# Altium PCB KitchenTimerPCBsmd.PcbDoc
Units mm, origin at the board's own origin, x right, y up, seen from the top; angles counter-clockwise.
Board outline 100 x 100 mm, 2 copper layers (Top Layer, Bottom Layer); 42 components, 39 nets, 169 pads, 24 vias.
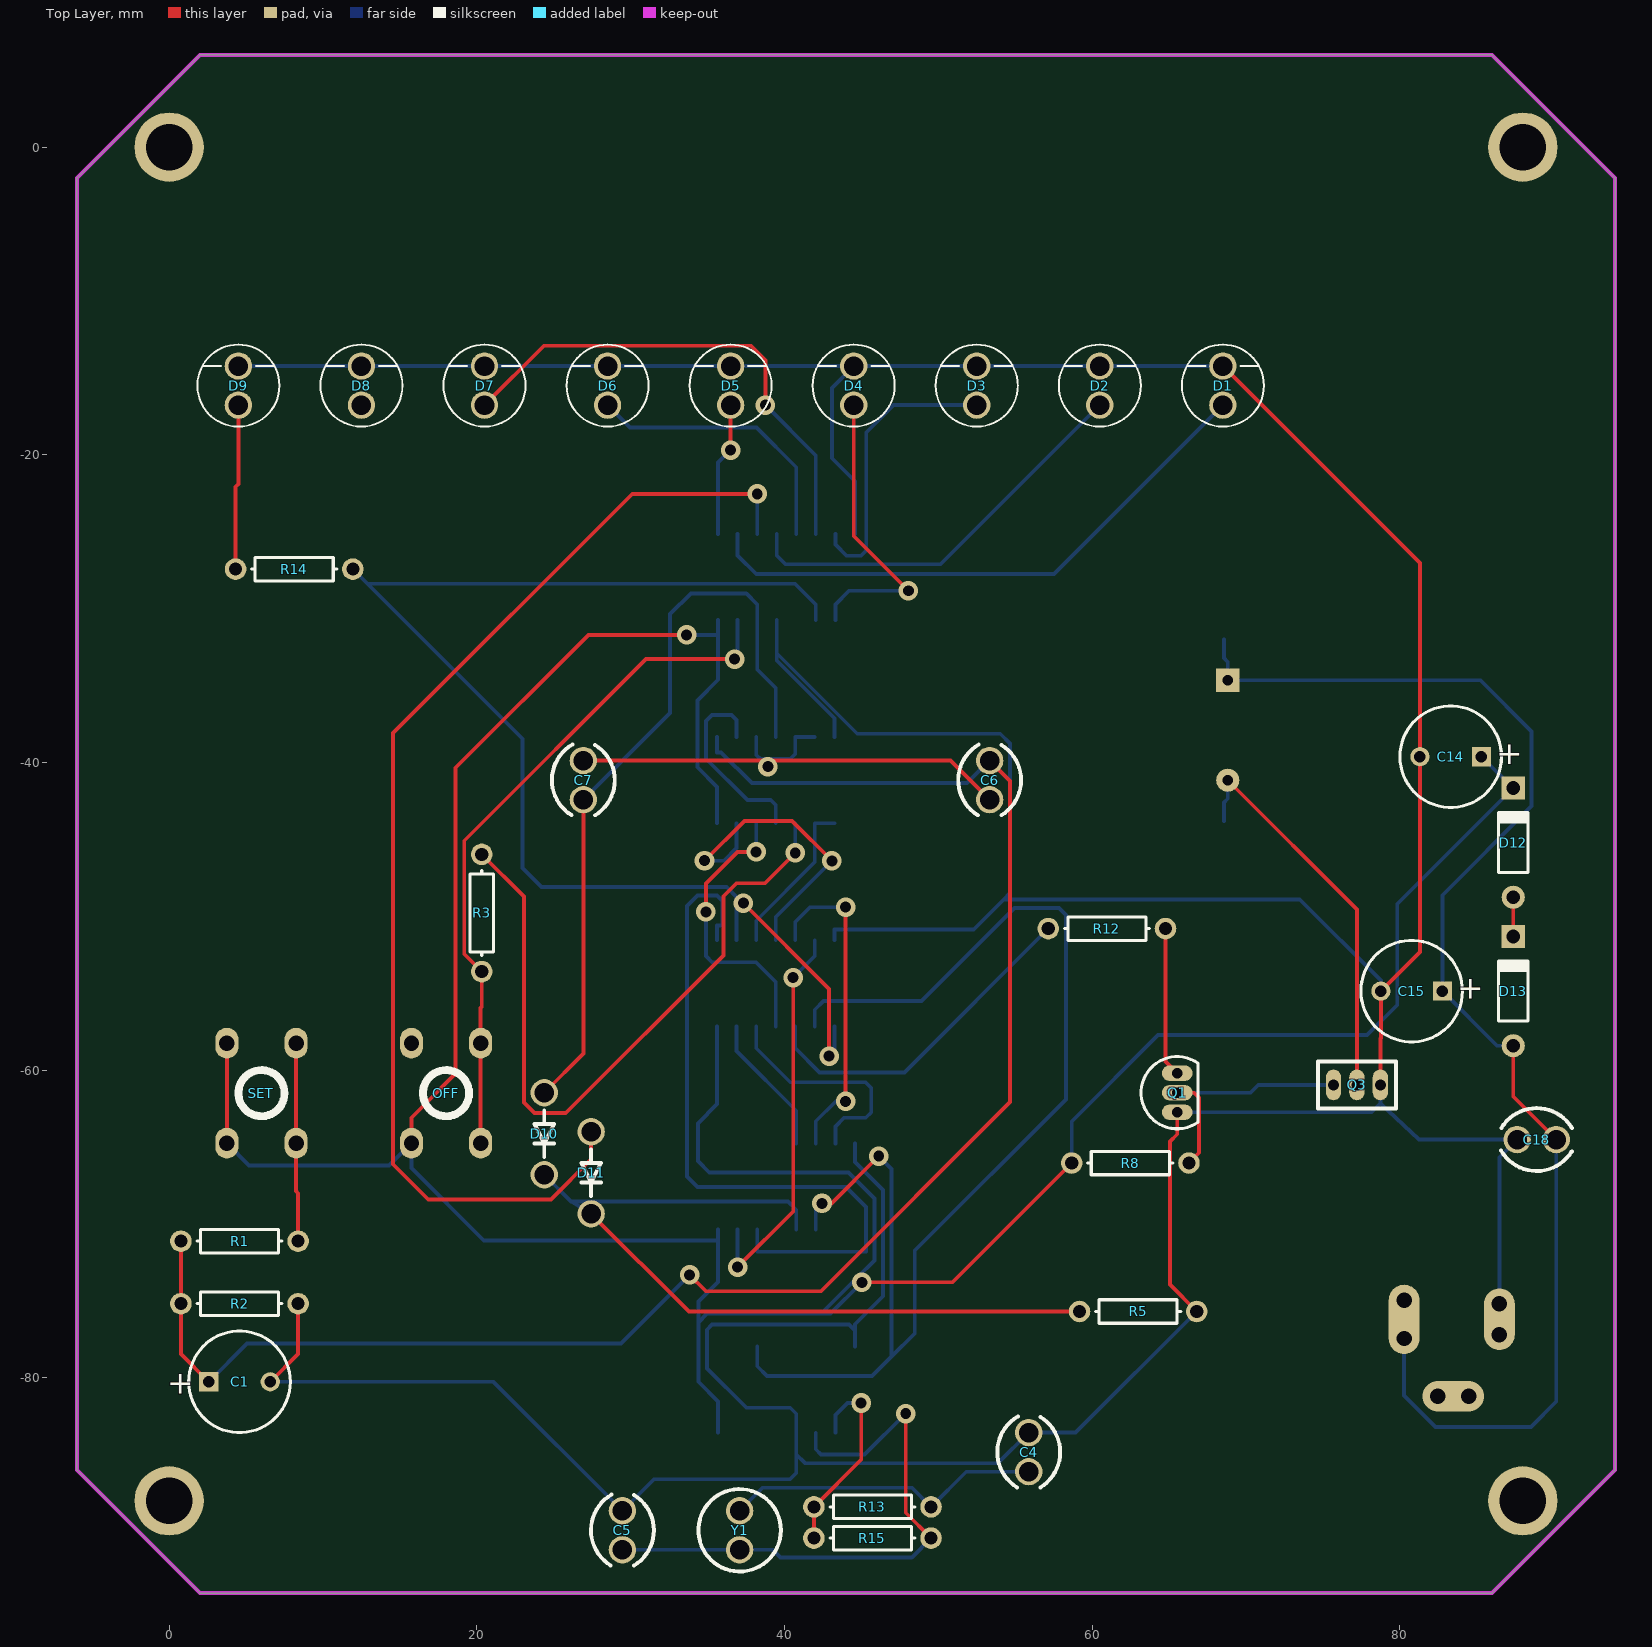
[diagram p0: Top Layer view]
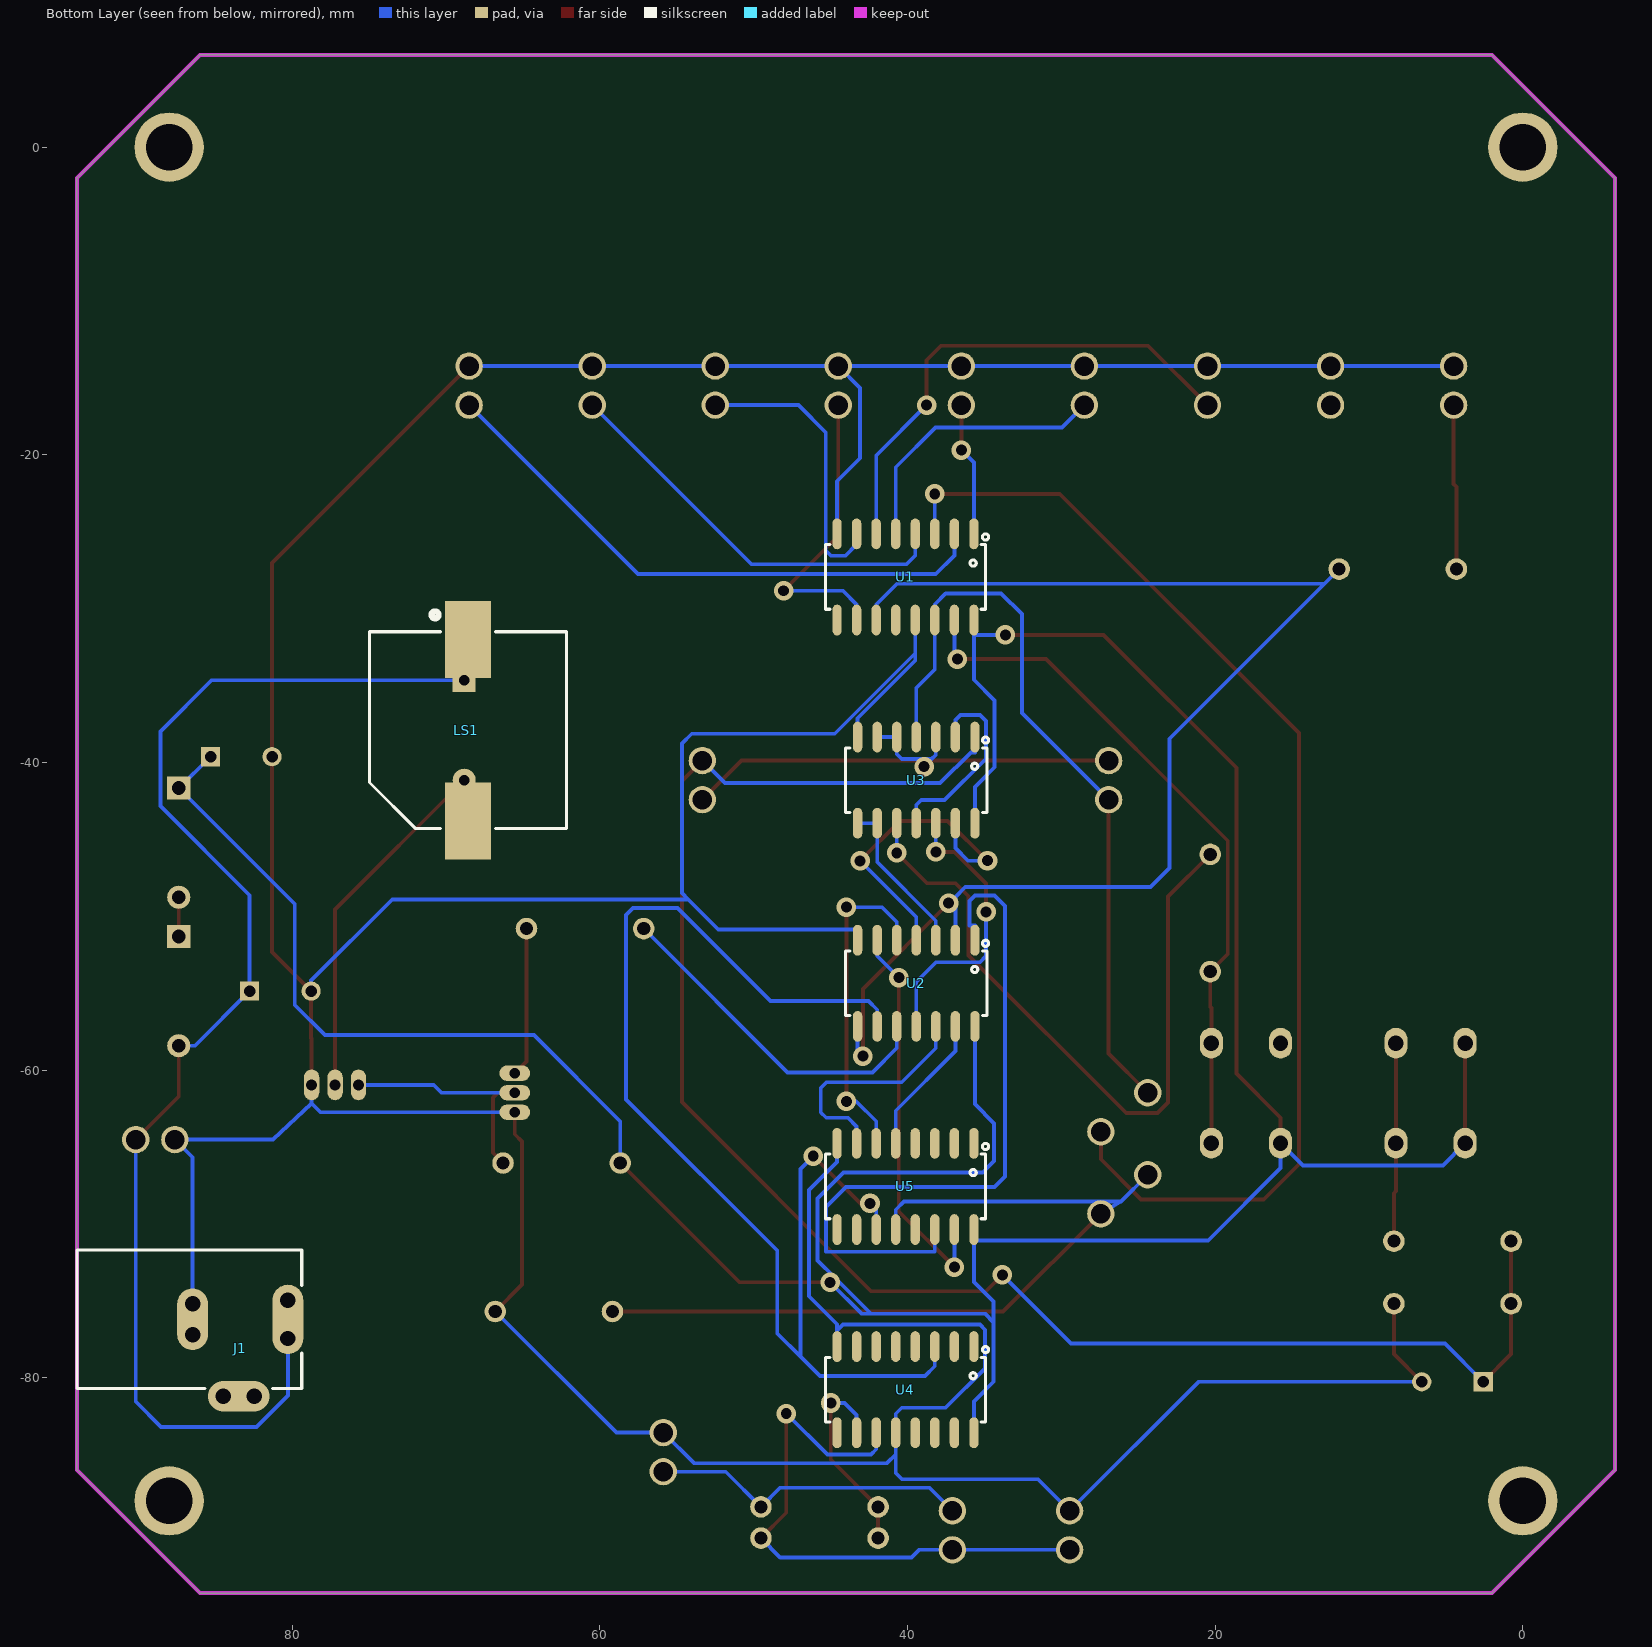
[diagram p1: Bottom Layer view, seen from below]
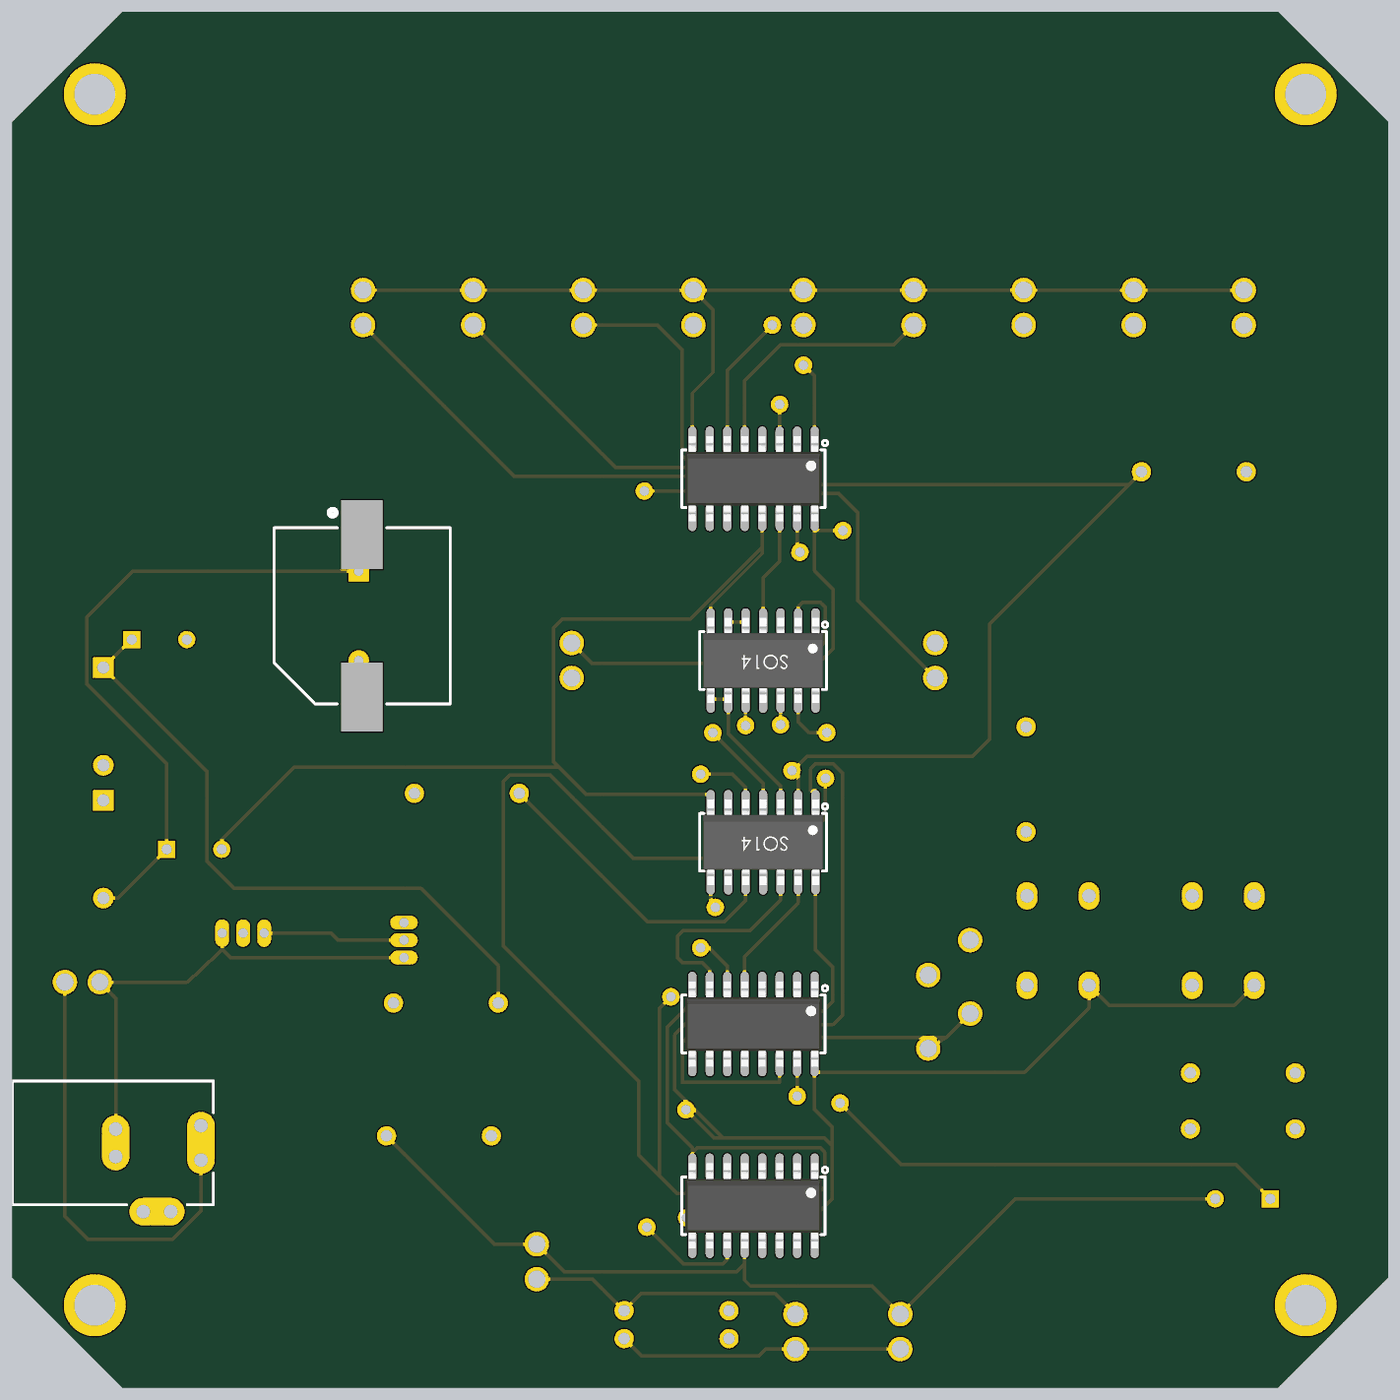
[diagram p2: 3D render of the assembled board from below, using the file's embedded part models]

## Layer stack, top to bottom
Top Layer: signal copper 0.0356
Dielectric: dielectric 0.32, FR-4, Dk 4.8
Bottom Layer: signal copper 0.0356

## Board outline
-6,-86 -6,-2 2,6 86,6 94,-2 94,-86 86,-94 2,-94

## Design rules (kind name [scope] priority, off if disabled: settings)
Clearance [All] p1: gap=0.3
DiffPairsRouting [All] p1 off: maxlimit=0.254 minlimit=0.254 mostfreqgap=0.254 maxuncoupledlength=12.7
FanoutControl Fanout_BGA [IsBGA] p1 off: bgadir=Out bgaviamode=Centered fanoutstyle=Auto fanoutdirection=Alternating viagrid=0.025 // Fanout_BGA (Default Rule)
FanoutControl Fanout_LCC [IsLCC] p2 off: bgadir=Out bgaviamode=Centered fanoutstyle=Auto fanoutdirection=Alternating viagrid=0.025 // Fanout_LCC (Default Rule)
FanoutControl Fanout_SOIC [IsSOIC] p3 off: bgadir=Out bgaviamode=Centered fanoutstyle=Auto fanoutdirection=Alternating viagrid=0.025 // Fanout_SOIC (Default Rule)
FanoutControl Fanout_Small [(CompPinCount < 5)] p4 off: bgadir=Out bgaviamode=Centered fanoutstyle=Auto fanoutdirection=OutThenIn viagrid=0.025 // Fanout_Small (Default Rule)
FanoutControl Fanout_Default [All] p5 off: bgadir=Out bgaviamode=Centered fanoutstyle=Auto fanoutdirection=Alternating viagrid=0.025 // Fanout_Default (Default Rule)
MinimumSolderMaskSliver [All] p1: minsoldermaskwidth=0.001
PolygonConnect [All] p1: connectstyle=Relief reliefconductorwidth=0.254 reliefentries=4 polygonreliefangle="90 Angle"
RoutingPriority [All] p1 off: routingpriority=0
RoutingTopology [All] p1 off: topology=Shortest
RoutingVias [All] p1 off: holewidth=0.711 width=1.27 viastyle="Through Hole" minholewidth=0.711 minwidth=1.27 maxholewidth=0.711 maxwidth=1.27
SilkToSilkClearance [All] p1: silktosilkclearance=0.001
SilkscreenOverComponentPads [All] p1: minsilkscreentomaskgap=0.001
SolderMaskExpansion [All] p1 off: expansion=0.102
TestPointUsage [All] p1: valid=0 allowmultiple=FALSE
Testpoint [All] p1: side=15 testpointundercomponent=TRUE minsize=1.016 maxsize=2.54 preferedsize=1.524 minholesize=0 maxholesize=1.016 preferedholesize=0.813 testpointgrid=0.025 style=1023 order=0-112345678
Width [All] p1: maxlimit=0.25 minlimit=0.25 preferedwidth=0.25
13 further rules are at their usual default settings.

## Components (designator, comment, footprint, x,y, rotation, side; value= is the part's Value field where it differs from the comment)
C1 "Cap Pol1" A 4.572,-80.264 r0 top
C4 "Cap" CAP100N 55.88,-84.836 r90 top
C5 "Cap" CAP100N 29.464,-89.916 r90 top
C6 "Cap" CAP100N 53.34,-41.148 r90 top
C7 "Cap" CAP100N 26.924,-41.148 r90 top
C14 "Cap Pol1" A 83.312,-39.624 r180 top
C15 "Cap Pol1" A 80.772,-54.864 r180 top
C18 "Cap" CAP100N 88.9,-64.516 r180 top
D1 "GRN" LED3MM 68.5,-15.5 r90 top locked (schematic designator D9)
D2 "GRN" LED3MM 60.5,-15.5 r90 top locked (schematic designator D5)
D3 "GRN" LED3MM 52.5,-15.5 r90 top locked (schematic designator D10)
D4 "GRN" LED3MM 44.5,-15.5 r90 top locked (schematic designator D6)
D5 "GRN" LED3MM 36.5,-15.5 r90 top locked (schematic designator D11)
D6 "GRN" LED3MM 28.5,-15.5 r90 top locked (schematic designator D7)
D7 "GRN" LED3MM 20.5,-15.5 r90 top locked (schematic designator D12)
D8 "GRN" LED3MM 12.5,-15.5 r90 top locked
D9 "RED" LED3MM 4.5,-15.5 r90 top locked (schematic designator D13)
D10 "1N4148" D_LN 24.384,-61.468 r270 top (schematic designator D14)
D11 "1N4148" D_LN 27.432,-64.008 r270 top (schematic designator D3)
D12 "1N4001" DO-35 87.376,-45.212 r90 top (schematic designator D22)
D13 "1N4001" DO-35 87.376,-54.864 r90 top (schematic designator D23)
J1 "PWR2.5" KLD-0202 93.98,-76.2 r180 bottom
LS1 "Buzzer" ABSM-1574 68.58,-32.004 r270 bottom
OFF "SW-PB" BUTTN 18,-61.5 r90 top locked
Q1 "C945" TO-92 65.532,-61.468 r0 top
Q3 "BD139" BD139 77.216,-60.96 r270 top
R1 "Res1" AXIAL-0.3 4.572,-71.12 r180 top
R2 "Res1" AXIAL-0.3 4.572,-75.184 r0 top
R3 "Res1" AXIAL-0.3 20.32,-49.784 r270 top
R5 "Res1" AXIAL-0.3 62.992,-75.692 r0 top
R8 "Res1" AXIAL-0.3 62.484,-66.04 r180 top
R12 "Res1" AXIAL-0.3 60.96,-50.8 r0 top
R13 "Res1" AXIAL-0.3 45.72,-88.392 r180 top
R14 "Res1" AXIAL-0.3 8.128,-27.432 r0 top
R15 "Res1" AXIAL-0.3 45.72,-90.424 r180 top
SET "SW-PB" BUTTN 6,-61.5 r270 top locked
U1 "HEF4017BT" SO_16 40.132,-27.94 r270 bottom
U2 "HEF4011BT" SO_14 39.432,-54.356 r270 bottom
U3 "HEF4001BT" SO_14 39.432,-41.148 r270 bottom
U4 "HEF4060BT" SO_16 40.132,-80.772 r270 bottom
U5 "HEF4060BT" SO_16 40.132,-67.564 r270 bottom
Y1 "ECS-040-20-4X-DU" XTAL 37.084,-89.916 r90 top

## Footprints (in the part's own frame and the unit in brackets; to place one, negate y for a bottom-side part, rotate by r counter-clockwise, add the part's x,y. Pads: shape width x height; smd on the part's side, far side on the other; paste and mask are expansions set on the pad)
A [mm] "Capacitor, Electrolytic, Radial; Body 4 x 5 mm (Dia.xH typ); Pin Spacing 1.5 mm (typ)"
  rect 1.25x1.25 hole 0.75: 1(-2,0)
  round 1.25 hole 0.75: 2(2,0)
  silkscreen extent -3.3,-3.3 3.3,3.3
ABSM-1574 [mm] "Magnetic Transducer Buzzer"
  rect 5x3 smd: 1(0,0) 2(11.8,0)
  rect 1.5x1.5 hole 0.7: 1A(2.65,-0.24)
  round 1.5 hole 0.7: 2A(9.15,-0.24)
  silkscreen extent -1.83,-6.4 12.3,6.4
AXIAL-0.3 [mm] "Resistor; 2 Leads"
  round 1.4 hole 0.85: 1(-3.81,0) 2(3.81,0)
  silkscreen extent -2.77,-0.76 2.77,0.76
BD139 [mm]
  oval 2x1 hole 0.7: 1(0,0) 2(0,-1.524) 3(0,1.524)
  silkscreen extent -1.52,-2.54 1.52,2.54
BUTTN [mm]
  oval 2x1.5 hole 1: 1(-3.25,2.25) 1(3.25,2.25) 2(-3.25,-2.25) 2(3.25,-2.25)
  silkscreen extent -1.5,-1.5 1.5,1.5
CAP100N [mil]
  round 70 hole 50: 1(50,0) 2(-50,0)
  silkscreen extent -90,-80 91,80
D_LN [mil]
  round 70 hole 50: 1(0,0) 2(210,0)
  silkscreen extent 45,-25 165,25
DO-35 [mm] "Diode, Axial; Body 3.8 x 1.9 mm (LxDia. max), Lead Dia. 0.53 mm (max)"
  round 1.5 hole 0.9: 1(-3.55,0)
  rect 1.5x1.5 hole 0.9: 2(3.55,0)
  silkscreen extent -1.95,-0.95 2.05,0.95
KLD-0202 [mm] "DC Power Jack, 2.5mm, KLD Series, PCB Mount"
  oval 2x4.5 all layers, no hole: 1(13.7,0)
  round 1.5 hole 1: 1A(13.7,-1.25) 1B(13.7,1.25) 2A(7.5,-1) 2B(7.5,1) 3A(9.5,-5) 3B(11.5,-5)
  oval 2x4 all layers, no hole: 2(7.5,0)
  oval 4x2 all layers, no hole: 3(10.5,-5)
  silkscreen extent 0,-4.5 14.6,4.5
LED3MM [mil] "Typical INFRARED GaAs LED; 2 Leads"
  round 70 hole 50: 1(-50,0) 2(50,0)
  silkscreen extent -105,-105 105,105
SO_14 [mm] "SOP, SOIC, 3.9mm width, 1.27mm pitch,"
  oval 2x0.6 smd: 1(-2.8,3.81) 2(-2.8,2.54) 3(-2.8,1.27) 4(-2.8,0) 5(-2.8,-1.27) 6(-2.8,-2.54) 7(-2.8,-3.81) 8(2.8,-3.81) 9(2.8,-2.54) 10(2.8,-1.27) 11(2.8,0) 12(2.8,1.27) 13(2.8,2.54) 14(2.8,3.81)
  silkscreen extent -2.8,-4.6 2.1,4.7, body extent -3.1,-4.38 3.1,4.37, height 1.75
SO_16 [mm] "SOP, SOIC, 3.9mm width, 1.27mm pitch,"
  oval 2x0.6 smd: 1(-2.8,4.445) 2(-2.8,3.175) 3(-2.8,1.905) 4(-2.8,0.635) 5(-2.8,-0.635) 6(-2.8,-1.905) 7(-2.8,-3.175) 8(-2.8,-4.445) 9(2.8,-4.445) 10(2.8,-3.175) 11(2.8,-1.905) 12(2.8,-0.635) 13(2.8,0.635) 14(2.8,1.905) 15(2.8,3.175) 16(2.8,4.445)
  silkscreen extent -2.8,-5.2 2.1,5.4, body extent -3.1,-4.95 3.1,4.95, height 1.7
TO-92 [mm] "TO, Flat Index; 3 In-Line, Axial Leads; Body Dia. 4.6mm; Leads 0.41 x 0.39 mm (max)"
  oval 2x1 hole 0.7: 1(0,0) 2(0,1.27) 3(0,-1.27)
  silkscreen extent -2.34,-2.34 1.35,2.34
XTAL [mil]
  round 70 hole 50: 1(50,0) 2(-50,0)
  silkscreen extent -105,-105 105,105

## Part data
C1 C14 C15: "Polarized Capacitor (Radial)"
C4 C5 C6 C7 C18: "Capacitor"
D1 D2 D3 D4 D5 D6 D7 D8 D9: library part LED0, "Typical INFRARED GaAs LED"
D10 D11 D12 D13: library part "Diode 1N4148", "High Conductance Fast Diode"
J1: "Low Voltage Power Supply Connector"
LS1: library part Speaker, "Loudspeaker"
OFF SET: "Switch"
Q1 Q3: library part NPN, "NPN Bipolar Transistor"
R1 R2 R3 R5 R8 R12 R13 R14 R15: "Resistor"
U1: library part CD4017_DIP16, "Counter, 10 decoded output"
U2 U3 U5: library part NE555_DIP8, "555 Timer, General-Purpose Single Bipolar Timer"
U4: library part UM66
Y1: library part XTAL, "Crystal Oscillator"

## Free pads (board coordinates)
  round 4.5 hole 3: 0(0,-88) 0(0,0) 0(88,-88) 0(88,0)

## Via types
v1: diameter 1.27, hole 0.711, Top Layer to Bottom Layer, 24 vias

## Nets (pads, with @x,y where several pads share a name; then routed paths per layer and width w, separated by ;. In a path a pad name is that pad's centre, name@x,y a point inside that pad or via, vN(x,y) a via of type N, cw(c..) or ccw(c..) an arc to the next point about the centre after c; other vN are vias at no path point)
5VDC: C15.1 C18.2 D13.1 J1.1 J1.1A J1.1B LS1.1 LS1.1A | length 92.4
  Top Layer w0.25: J1.1A J1.1 J1.1B ; D13.1 87.376,-61.722 C18.2
  Bottom Layer w0.25: LS1.1 68.58,-33.218 68.82,-33.458 LS1.1A 85.249,-34.654 88.574,-37.979 88.574,-42.83 82.772,-48.632 C15.1 86.322,-58.414 D13.1 ; J1.1 J1.1A 80.28,-81.159 82.312,-83.191 88.523,-83.191 90.17,-81.544 C18.2
GND: C1.2 C4.1 C5.1 C14.2 C15.2 C18.1 D1.2 D2.2 D3.2 D4.2 D5.2 D6.2 D7.2 D8.2 D9.2 J1.2 J1.2A J1.2B Q1.3 Q3.3 R2.2 R5.2 U1.8 U1.13 U2.7 U3.7 U4.8 U4.12 U5.8 | length 379
  Top Layer w0.25: C1.2 8.382,-78.454 R2.2 ; Q1.3 65.532,-64.171 65.054,-64.649 65.054,-73.944 R5.2 ; D1.2 81.312,-27.042 C14.2 81.312,-52.324 C15.2 78.772,-57.911 78.74,-57.943 Q3.3 ; J1.2A J1.2 J1.2B
  Bottom Layer w0.25: D9.2 D8.2 D7.2 D6.2 D5.2 D4.2 ; C1.2 21.082,-80.264 C5.1 31.515,-86.595 40.361,-86.595 40.767,-86.188 40.767,-84.99 ; U2.7 43.242,-50.857 52.303,-50.857 ; U3.7 43.242,-37.127 39.497,-33.382 39.497,-32.899 ; U5.8 44.577,-65.966 46.402,-67.791 46.402,-74.7 44.577,-76.525 44.577,-76.936 ; U1.8 44.577,-21.719 43.083,-20.224 43.083,-15.647 D4.2 ; Q1.3 78.16,-62.738 78.74,-62.158 ; R5.2 58.928,-83.566 C4.1 53.893,-85.553 41.33,-85.553 40.767,-84.99 ; D1.2 D2.2 D3.2 D4.2 ; Q3.3 78.74,-62.158 ; C15.2 78.772,-54.171 73.502,-48.901 54.259,-48.901 ; J1.2 J1.2B 86.48,-65.666 C18.1 81.253,-64.516 78.74,-62.158 ; 39.497,-32.899 44.729,-38.131 54.03,-38.131 54.665,-38.766 54.665,-48.495 54.259,-48.901 ; 39.497,-32.899 U1.13 39.497,-32.899 ; 40.767,-84.99 U4.12 ; 40.767,-84.99 U4.12 ; U4.12 40.767,-82.336 40.378,-81.946 37.52,-81.946 34.962,-79.388 34.962,-76.882 35.298,-76.547 44.188,-76.547 44.577,-76.936 ; 44.577,-76.936 U4.8 44.577,-76.936 ; 52.303,-50.857 54.259,-48.901 ; 52.303,-50.857 54.259,-48.901
NetC1_1: C1.1 C6.1 R1.2 R2.1 U3.1 | length 113.3
  Top Layer w0.25: R1.2 R2.1 0.762,-78.454 C1.1 ; v1(33.837,-73.31) 34.904,-74.377 42.371,-74.377 54.665,-62.084 54.665,-41.203 C6.1
  Bottom Layer w0.25: C1.1 5.055,-77.781 29.367,-77.781 v1(33.837,-73.31) ; U3.1 35.622,-39.344 35.882,-39.344 37.881,-41.343 51.875,-41.343 C6.1
NetC4_2: C4.2 R13.1 Y1.1 | length 20.9
  Bottom Layer w0.25: Y1.1 38.577,-87.153 48.291,-87.153 R13.1 51.816,-86.106 C4.2
NetC5_2: C5.2 R15.1 U4.11 Y1.2 | length 37.7
  Top Layer w0.25: v1(47.883,-82.327) 47.883,-88.777 R15.1
  Bottom Layer w0.25: C5.2 Y1.2 39.247,-91.186 39.736,-91.675 48.279,-91.675 R15.1 ; U4.11 42.037,-84.651 42.383,-84.997 45.214,-84.997 v1(47.883,-82.327)
NetC6_2: C6.2 C7.1 U3.3 U3.5 U3.6 | length 47
  Top Layer w0.25: v1(38.917,-40.265) v1@38.53,-39.878 ; C6.2 50.8,-39.878 38.917,-39.878 v1@38.53,-39.878 ; v1@38.53,-39.878 C7.1 v1@38.53,-39.878
  Bottom Layer w0.25: U3.3 38.162,-39.51 ; v1(38.917,-40.265) 38.434,-39.782 ; U3.6 U3.5 40.702,-39.458 40.378,-39.782 38.917,-39.782 38.434,-39.782 ; 38.162,-39.51 38.434,-39.782 ; 38.162,-39.51 38.434,-39.782
NetC7_2: C7.2 D10.1 U1.14 U3.4 | length 50.1
  Top Layer w0.25: D10.1 26.924,-58.928 C7.2
  Bottom Layer w0.25: C7.2 32.567,-36.775 32.567,-30.359 33.913,-29.013 37.52,-29.013 38.227,-29.72 U1.14 38.227,-33.955 39.432,-35.16 U3.4
NetD1_1: D1.1 U1.2 | length 38
  Bottom Layer w0.25: U1.2 36.957,-26.549 38.161,-27.753 57.517,-27.753 D1.1
NetD2_1: D2.1 U1.4 | length 26.9
  Bottom Layer w0.25: U1.4 39.497,-26.549 40.063,-27.115 50.155,-27.115 D2.1
NetD3_1: D3.1 U1.7 | length 18.8
  Bottom Layer w0.25: U1.7 43.307,-25.838 44.034,-26.565 44.984,-26.565 45.318,-26.231 45.318,-18.548 47.096,-16.77 D3.1
NetD4_1: D4.1 U1.10 | length 19.7
  Top Layer w0.25: D4.1 44.5,-25.274 v1(48.061,-28.835)
  Bottom Layer w0.25: U1.10 43.307,-29.724 44.196,-28.835 v1(48.061,-28.835)
NetD5_1: D5.1 U1.1 | length 8.7
  Top Layer w0.25: v1(36.5,-19.691) D5.1
  Bottom Layer w0.25: U1.1 35.687,-20.504 v1(36.5,-19.691)
NetD6_1: D6.1 U1.5 | length 18.3
  Bottom Layer w0.25: D6.1 29.948,-18.218 38.176,-18.218 40.767,-20.809 U1.5
NetD7_1: D7.1 U1.6 | length 32.9
  Top Layer w0.25: D7.1 24.361,-12.909 37.825,-12.909 38.765,-13.849 v1(38.765,-16.77)
  Bottom Layer w0.25: v1(38.765,-16.77) 42.037,-20.042 U1.6
NetD9_1: D9.1 R14.1 | length 10.7
  Top Layer w0.25: R14.1 4.318,-22.079 4.5,-21.897 D9.1
NetD10_2: D10.2 D11.2 R5.1 U5.12 | length 54.5
  Top Layer w0.25: D11.2 33.782,-75.692 R5.1
  Bottom Layer w0.25: D10.2 26.117,-68.535 ; D11.2 26.117,-68.535 ; U5.12 40.767,-69.077 40.225,-68.535 27.432,-68.535 26.117,-68.535
NetD11_1: D11.1 U1.3 | length 77.4
  Top Layer w0.25: D11.1 27.432,-65.796 24.82,-68.408 16.844,-68.408 14.558,-66.122 14.558,-38.081 30.103,-22.536 v1(38.231,-22.536)
  Bottom Layer w0.25: U1.3 38.227,-22.54 v1(38.231,-22.536)
NetD12_1: D12.1 D13.2 | length 2.6
  Top Layer w0.25: D13.2 D12.1
NetJ1_3: J1.3 J1.3A J1.3B | length 2
  Bottom Layer w0.25: J1.3B J1.3 J1.3A
NetLS1_2: LS1.2 LS1.2A Q3.1 | length 26
  Top Layer w0.25: LS1.2A 77.216,-49.55 Q3.1
  Bottom Layer w0.25: LS1.2 68.58,-42.602 68.82,-42.362 LS1.2A
NetOFF_2: OFF.2 R3.2 U1.15 | length 45.3
  Top Layer w0.25: OFF.2@20.25,-64.75 20.25,-58.25 20.25,-55.962 20.32,-55.892 R3.2 19.181,-52.455 19.181,-45.091 30.992,-33.28 v1(36.758,-33.28)
  Bottom Layer w0.25: v1(36.758,-33.28) 36.957,-33.081 U1.15
NetQ1_1: Q1.1 Q3.2 R8.1 | length 16.5
  Top Layer w0.25: Q1.1 66.635,-61.468 66.959,-61.791 66.959,-65.375 R8.1
  Bottom Layer w0.25: Q1.1 70.295,-61.468 70.803,-60.96 Q3.2
NetQ1_2: Q1.2 R12.2 | length 9.7
  Top Layer w0.25: R12.2 64.77,-59.436 Q1.2
NetR1_1: R1.1 SET.1 | length 12.9
  Top Layer w0.25: SET.1@8.25,-58.25 8.25,-64.75 8.25,-67.87 8.382,-68.002 R1.1
NetR3_1: R3.1 U3.10 | length 46.4
  Top Layer w0.25: R3.1 23.067,-48.721 23.067,-62.109 23.753,-62.795 25.785,-62.795 36.042,-52.538 36.042,-48.696 36.885,-47.853 38.728,-47.853 v1(40.702,-45.878)
  Bottom Layer w0.25: v1(40.702,-45.878) U3.10
NetR12_1: R12.1 U2.10 | length 22.4
  Bottom Layer w0.25: U2.10 40.702,-58.566 42.283,-60.146 47.804,-60.146 R12.1
NetR13_2: R13.2 R15.2 U4.10 | length 13.2
  Top Layer w0.25: R15.2 R13.2 44.988,-85.314 v1(44.988,-81.642)
  Bottom Layer w0.25: U4.10 43.307,-82.429 44.094,-81.642 v1(44.988,-81.642)
NetR14_2: R14.2 U1.11 U2.2 U2.8 | length 90.5
  Top Layer w0.25: v1(37.335,-49.148) 42.905,-54.718 v1(42.905,-59.086)
  Bottom Layer w0.25: v1(37.335,-49.148) 37.294,-49.148 v1@36.892,-49.591 ; U1.11 42.037,-29.72 40.695,-28.378 12.884,-28.378 ; v1(42.905,-59.086) 43.242,-58.749 U2.8 ; 12.884,-28.378 R14.2 12.884,-28.378 ; 12.884,-28.378 22.966,-38.46 22.966,-46.869 24.201,-48.104 36.25,-48.104 36.892,-48.746 36.892,-49.148 v1@36.892,-49.591 ; v1@36.892,-49.591 U2.2 v1@36.892,-49.591
NetU2_1: U2.1 U5.14 | length 47.1
  Bottom Layer w0.25: U2.1 35.622,-50.603 35.971,-50.603 35.971,-49.009 35.615,-48.654 34.345,-48.654 33.659,-49.34 33.659,-66.91 34.342,-67.593 44.004,-67.593 45.302,-68.891 45.302,-71.812 38.227,-71.812 U5.14
NetU2_3: U2.3 U3.8 U3.9 | length 10.5
  Bottom Layer w0.25: U2.3 38.162,-50.291 41.972,-46.481 U3.9 U3.8
NetU2_4: U2.4 U3.13 | length 21.2
  Top Layer w0.25: v1(34.802,-46.386) 37.393,-43.796 40.485,-43.796 v1(43.083,-46.393)
  Bottom Layer w0.25: v1(34.802,-46.386) 36.072,-46.386 36.892,-45.567 U3.13 ; U2.4 39.432,-50.044 v1(43.083,-46.393)
NetU2_5: U2.5 U5.6 | length 21.4
  Top Layer w0.25: v1(43.972,-62.029) v1(43.972,-49.409)
  Bottom Layer w0.25: U2.5 40.702,-50.361 41.654,-49.409 v1(43.972,-49.409) ; U5.6 42.037,-63.328 43.337,-62.029 v1(43.972,-62.029)
NetU2_6: U2.6 U5.15 | length 25.8
  Top Layer w0.25: v1(36.957,-72.802) 40.568,-69.191 v1(40.568,-53.981)
  Bottom Layer w0.25: v1(36.957,-72.802) U5.15 ; v1(40.568,-53.981) 41.972,-52.577 U2.6
NetU2_9: U2.9 U4.3 U5.11 | length 86.5
  Top Layer w0.25: v1(42.439,-68.662) 43.057,-68.662 v1(46.131,-65.589)
  Bottom Layer w0.25: U4.3 38.227,-79.254 38.862,-79.889 45.699,-79.889 ; U2.9 41.972,-56.076 42.543,-55.505 48.899,-55.505 54.944,-49.46 57.84,-49.46 58.297,-49.917 58.297,-61.906 48.467,-71.736 48.467,-77.12 46.969,-78.619 ; U5.11 42.037,-69.064 v1(42.439,-68.662) ; v1(46.131,-65.589) 46.969,-66.427 46.969,-78.619 ; 45.699,-79.889 46.969,-78.619 ; 45.699,-79.889 46.969,-78.619
NetU2_11: U2.11 U3.12 | length 18.8
  Top Layer w0.25: v1(34.897,-49.714) 34.897,-47.864 36.947,-45.814 v1(38.162,-45.814)
  Bottom Layer w0.25: v1(34.897,-49.714) 34.897,-52.59 35.298,-52.99 38.155,-52.99 39.432,-54.267 U2.11 ; v1(38.162,-45.814) U3.12
NetU2_12: U2.12 U5.7 | length 15.4
  Bottom Layer w0.25: U2.12 38.162,-58.578 40.372,-60.788 45.273,-60.788 45.641,-61.156 45.641,-62.744 45.287,-63.098 43.87,-63.098 43.307,-63.661 U5.7
NetU2_13: U2.13 U5.5 | length 9.2
  Bottom Layer w0.25: U2.13 36.892,-58.767 40.767,-62.642 U5.5
NetU3_2: U3.2 U3.11 | length 12.8
  Bottom Layer w0.25: U3.2 36.892,-37.237 36.568,-36.912 35.298,-36.912 34.897,-37.313 34.897,-39.759 37.587,-42.449 39.108,-42.449 39.432,-42.774 U3.11
VCC: C14.1 D12.2 OFF.1@15.75,-64.75 R8.2 SET.2 U1.16 U2.14 U3.14 U4.16 U5.16 | length 237.3
  Top Layer w0.25: SET.2@3.75,-64.75 SET.2@3.75,-58.25 ; OFF.1@15.75,-64.75 15.75,-63.1 18.622,-60.227 18.622,-40.341 27.258,-31.705 v1(33.634,-31.705) ; v1(45.038,-73.793) 50.921,-73.793 R8.2
  Bottom Layer w0.25: SET.2@3.75,-64.75 5.198,-66.198 14.302,-66.198 15.75,-64.75 15.75,-66.374 20.451,-71.075 U5.16@35.687,-71.075 ; v1(33.634,-31.705) U1.16@35.687,-31.705 ; U2.14 35.622,-62.211 34.37,-63.462 34.37,-65.919 35.107,-66.656 44.167,-66.656 45.852,-68.341 45.852,-72.371 44.734,-73.489 42.388,-75.834 ; U3.14 35.622,-41.586 34.347,-40.311 34.347,-35.966 35.687,-34.626 U1.16@35.687,-31.705 ; U4.16 35.687,-81.536 34.412,-80.261 ; v1(45.038,-73.793) 42.997,-75.834 42.388,-75.834 ; R8.2 58.674,-63.332 64.292,-57.715 77.881,-57.715 79.836,-55.759 79.836,-49.202 D12.2 87.35,-41.662 C14.1 ; 34.412,-80.261 34.412,-76.396 ; 34.412,-80.261 34.412,-76.396 ; 34.412,-76.396 34.412,-75.047 35.687,-73.772 U5.16@35.687,-71.075 ; 34.412,-76.396 34.974,-75.834 ; 34.974,-75.834 42.388,-75.834 ; 34.974,-75.834 42.388,-75.834 ; U5.16@35.687,-71.075 U5.16 U5.16@35.687,-71.075 ; U1.16@35.687,-31.705 U1.16 U1.16@35.687,-31.705
pads on no net: D8.1 OFF.1@15.75,-58.25 U1.9 U1.12 U4.1 U4.2 U4.4 U4.5 U4.6 U4.7 U4.9 U4.13 U4.14 U4.15 U5.1 U5.2 U5.3 U5.4 U5.9 U5.10 U5.13

## Keep-outs
Keep-Out Layer:
  the board outline again, w0.254

## Text inside footprints (layer, text, board x,y; h text height)
C1: Top Overlay "+" at -0.127,-81.026 h1.5
C14: Top Overlay "+" at 88.011,-38.862 h1.5 r180
C15: Top Overlay "+" at 85.471,-54.102 h1.5 r180
J1: Mechanical 1 "Mech 2 - Clearance, move to internal plane if present" at 93.694,-71.134 h0.3; Mechanical 1 "Mech 1 - Slot cut-out" at 93.694,-70.634 h0.3; Mechanical 1 "Assign keep-out area to slot" at 93.694,-69.634 h0.3; Mechanical 1 "Alert PCB fab to slot details" at 93.694,-70.134 h0.3